# EAGLE board Android Wearable 2-Layer (EAGLE 5.11)
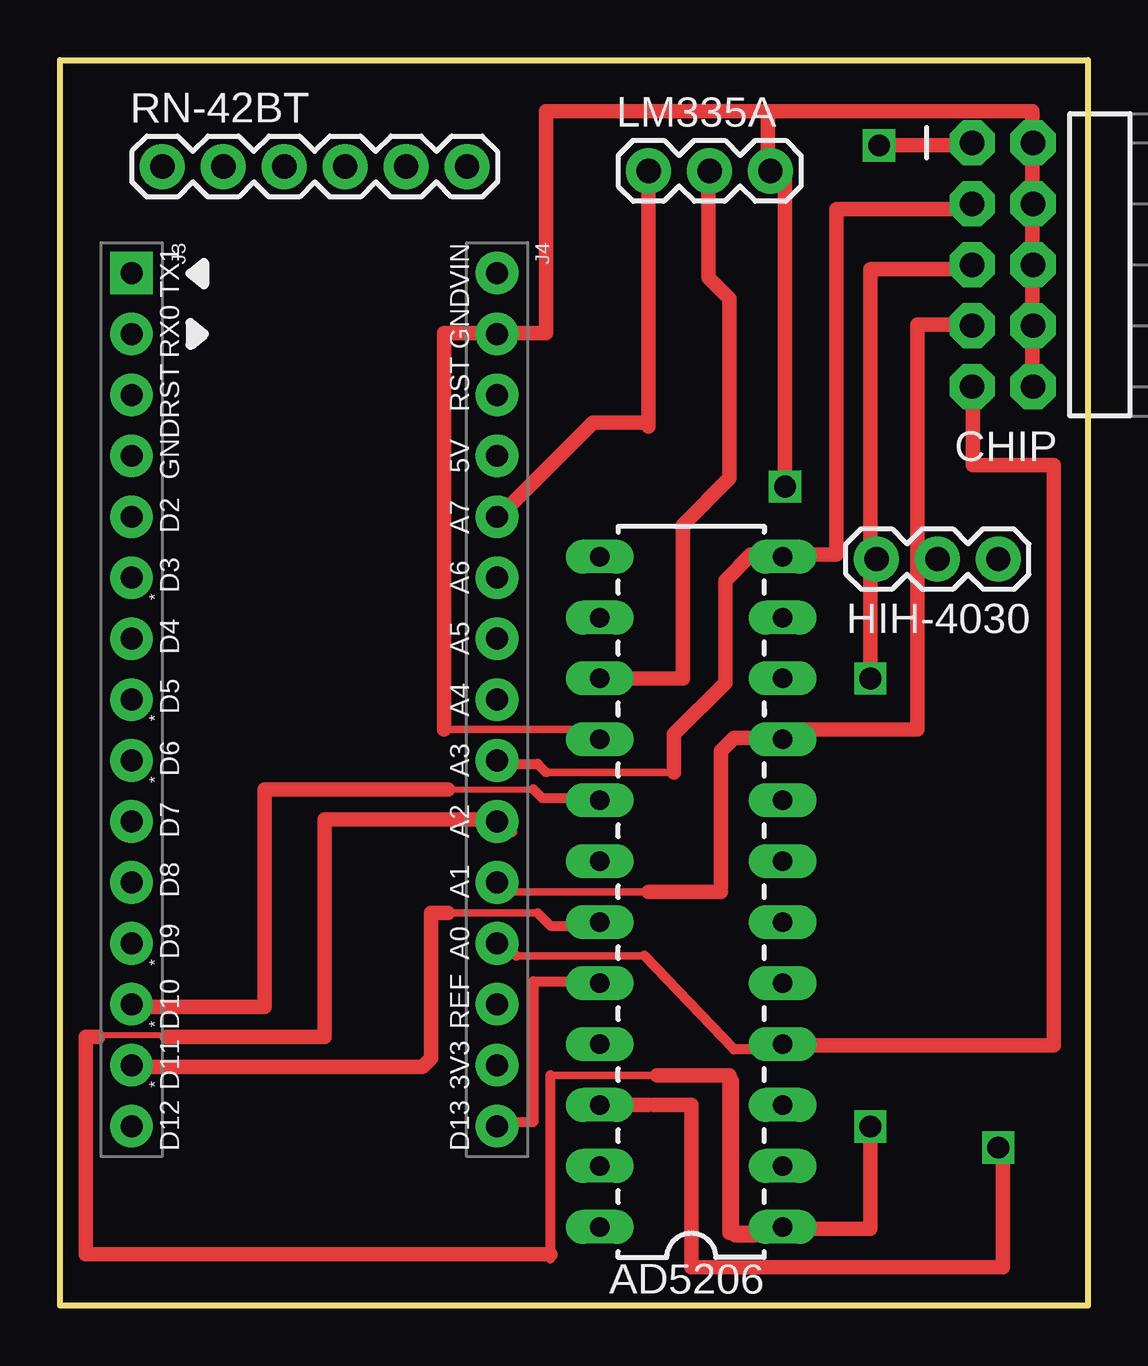
[diagram p0: board, top side]
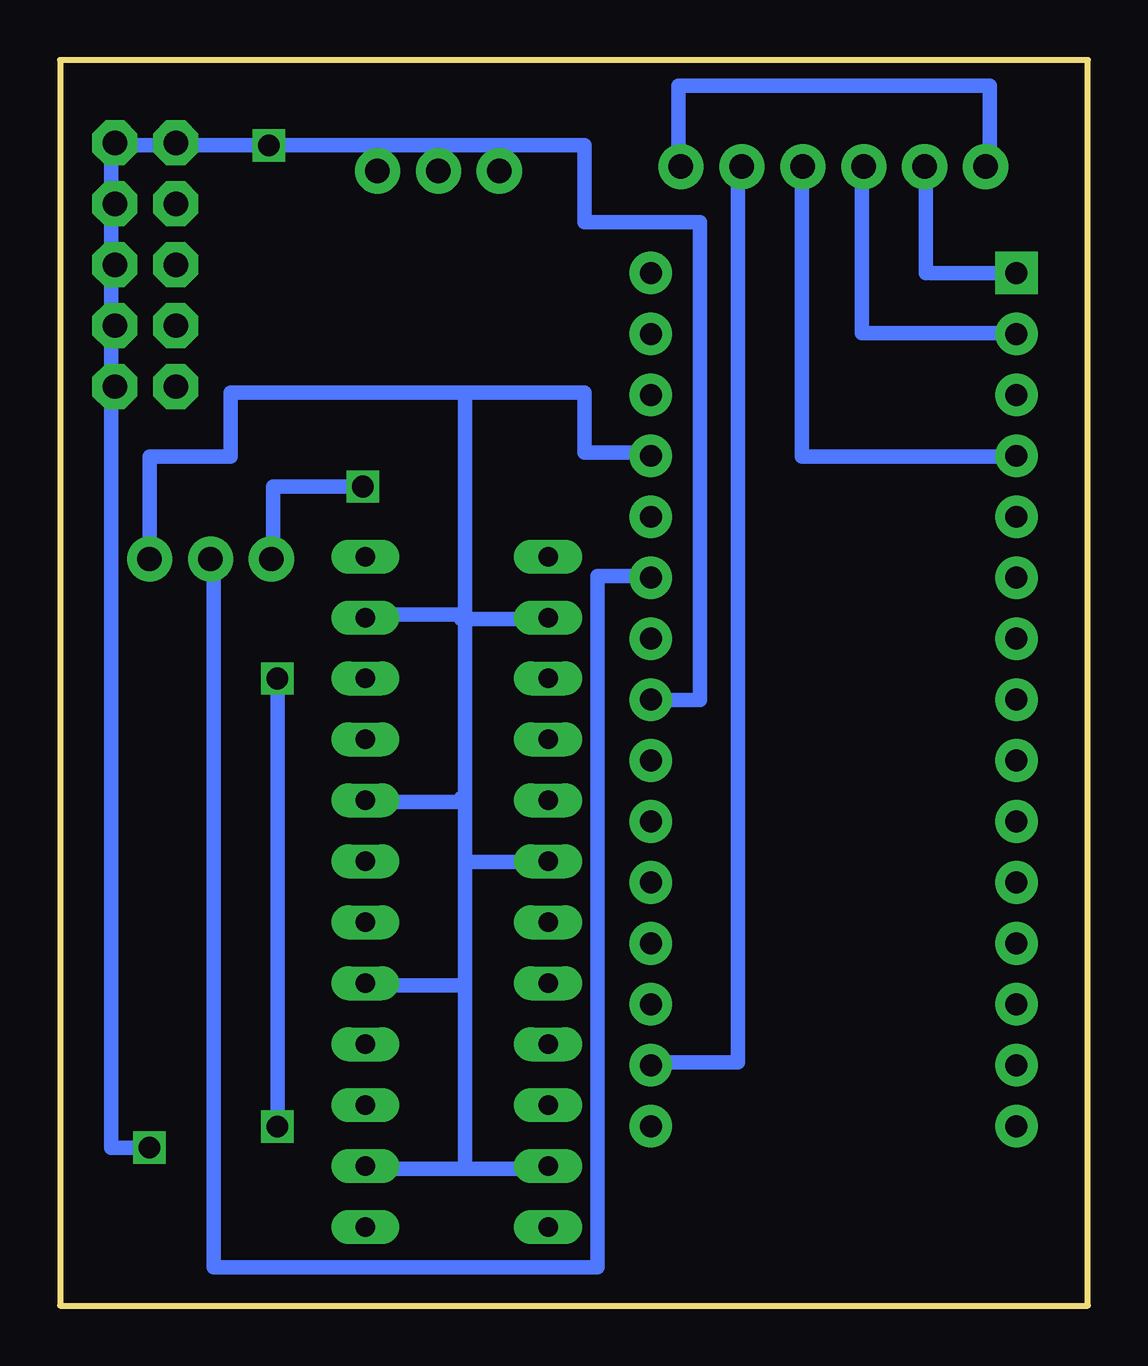
[diagram p1: board, bottom side, seen from below]

Size 42.85 x 51.92 mm. Coordinates in mm from the lower left corner, seen from the top.
Outline: 0,51.92 42.85,51.92 42.85,0 0,0 0,51.92
Copper layers (1*16): Top 0.035mm / dielectric 1.5mm / Bottom 0.035mm
Design rules "default *": minimum track width 8mil, minimum drill 16mil, track to track 8mil, track to pad 8mil, pad to pad 8mil, via to via 8mil, smd to smd 8mil, copper to edge 8mil, drill to drill 8mil, minimum pad ring 12mil, minimum via ring 8mil, stop-mask expansion 4mil, vias tented up to drill 18mil, thermal gap 10mil

## Footprints (pad centres in the part's own frame; a part is rotated, then mirrored left to right if it is on the bottom)
DIL24 = drill 0.813 long: 1 -13.97,-3.81; 2 -11.43,-3.81; 3 -8.89,-3.81; 4 -6.35,-3.81; 5 -3.81,-3.81; 6 -1.27,-3.81; 7 1.27,-3.81; 8 3.81,-3.81; 9 6.35,-3.81; 10 8.89,-3.81; 11 11.43,-3.81; 12 13.97,-3.81; 13 13.97,3.81; 14 11.43,3.81; 15 8.89,3.81; 16 6.35,3.81; 17 3.81,3.81; 18 1.27,3.81; 19 -1.27,3.81; 20 -3.81,3.81; 21 -6.35,3.81; 22 -8.89,3.81; 23 -11.43,3.81; 24 -13.97,3.81
2X5-RA = drill 1.016 pad 1.88 octagon: 1 -1.27,5.08; 2 1.27,5.08; 3 -1.27,2.54; 4 1.27,2.54; 5 -1.27,0; 6 1.27,0; 7 -1.27,-2.54; 8 1.27,-2.54; 9 -1.27,-5.08; 10 1.27,-5.08
1X03 = drill 1.016 pad 1.88 round: 1 0,0; 2 2.54,0; 3 5.08,0
HEAD15-NOSS = drill 0.914 pad 1.778 square: 1 0,0 | drill 0.914 pad 1.778 round: 2 2.54,0; 3 5.08,0; 4 7.62,0; 5 10.16,0; 6 12.7,0; 7 15.24,0; 8 17.78,0; 9 20.32,0; 10 22.86,0; 11 25.4,0; 12 27.94,0; 13 30.48,0; 14 33.02,0; 15 35.56,0
HEAD15-NOSS-1 = drill 0.914 pad 1.778 round: 1 0,0; 2 2.54,0; 3 5.08,0; 4 7.62,0; 5 10.16,0; 6 12.7,0; 7 15.24,0; 8 17.78,0; 9 20.32,0; 10 22.86,0; 11 25.4,0; 12 27.94,0; 13 30.48,0; 14 33.02,0; 15 35.56,0
1X06 = drill 1.016 pad 1.88 round: 1 0,0; 2 2.54,0; 3 5.08,0; 4 7.62,0; 5 10.16,0; 6 12.7,0

## Placement (x,y rotation side)
AD5206  [DIL24]  26.31,17.25 90 top
CHIP  [2X5-RA]  39.29,43.38 0 top
HIH-4030  [1X03]  39.12,31.11 180 top
J3  HEAD15-NOSS  [HEAD15-NOSS]  2.98,43.04 270 top
J4  HEAD15-NOSS-1  [HEAD15-NOSS-1]  18.22,43.04 270 top
LM335A  [1X03]  24.54,47.29 0 top
RN-42BT  [1X06]  4.27,47.47 0 top

## Library data of the parts
AD5206 CHIP HIH-4030 LM335A RN-42BT = SparkFun
J3 J4 = MyCON2

## Nets
S$72: HIH-4030.1

## Tracks (layer width: path | path; a pad name or v marks a point on that pad's centre or on a via)
S$1
  Bottom 0.61: 11.91,47.47 11.91,35.38 3.02,35.38
S$2
  Top 0.254: 4.37,11.25 1.65,11.25
S$3
  Bottom 0.61: 14.58,47.47 14.58,10.13 18.31,10.13
S$4
  Bottom 0.61: 30.05,28.8 26.14,28.8 26.14,28.63
S$5
  Bottom 0.61: 26.14,21.16 26.14,20.98
S$6
  Top 0.61: 24.71,8.36 26.31,8.36 26.31,1.6 39.29,1.6 39.29,6.4
S$7
  Bottom 0.61: 30.23,20.98 26.31,20.98
S$8
  Top 0.61: 30.23,10.85 41.43,10.85 41.43,35.03 38.05,35.03 38.05,38.05
S$9
  Top 0.305: 4.45,11.2 10.85,11.2
  Top 0.406: 18.31,20.27 18.85,19.74
  Top 0.61: 18.31,20.27 11.02,20.27 11.02,11.2 4.45,11.2
S$10
  Bottom 0.61: 2.84,43.03 6.58,43.03
S$11  (via drill 0.9)
  Top 0.305: 20.45,9.6 24.89,9.6
  Top 0.406: 30.23,3.2 30.23,2.84 28.09,2.84 28.09,9.42 27.91,9.6 | 20.45,1.96 20.45,2.13 20.45,9.6
  Top 0.61: v33.78,7.47 33.78,3.2 30.23,3.2 30.05,3.02 27.91,3.02 27.91,9.6 24.89,9.6 | 1.6,11.2 1.07,11.2 1.07,2.13 20.45,2.13
S$12
  Top 0.61: 33.78,26.31 33.78,43.21 38.23,43.21
S$14
  Top 0.305: 24.36,14.58 19.02,14.58
  Top 0.406: 30.05,10.67 28.09,10.67 24.36,14.58 | 19.02,14.58 18.31,15.11
S$15
  Top 0.305: 18.67,17.25 24.89,17.25
  Top 0.406: 18.31,17.6 18.67,17.25
  Top 0.61: 27.56,17.25 24.89,17.25 24.54,17.25
S$18  (via drill 0.9)
  Top 0.305: 22.58,24 16,24
  Top 0.406: 22.58,23.65 22.58,24
  Top 0.61: 40.72,37.87 40.54,37.87 40.54,49.78 29.52,49.78 | 29.52,49.78 20.27,49.78 20.27,40.54 18.31,40.54 18.14,40.54 16,40.54 16,24 | 29.52,49.78 29.52,47.3 30.23,47.3 v30.23,34.14
  Bottom 0.61: 33.96,31.11 33.96,34.14 v30.23,34.14
S$19
  Top 0.61: 29.87,23.65 28.09,23.65 27.56,23.11 27.56,17.42
S$21
  Top 0.305: 20.27,22.22 25.6,22.22
  Top 0.406: 20.27,22.22 19.91,22.58 18.31,22.58
  Top 0.61: 30.23,31.29 28.8,31.29 27.74,30.23 27.74,25.96 25.6,23.82 25.6,22.22
S$23  (via drill 0.9)
  Top 0.61: v34.14,48.36 38.41,48.36
  Bottom 0.61: 18.49,25.25 16.18,25.25 16.18,45.16 20.98,45.16 20.98,48.36 v34.14,48.36 40.72,48.36 40.72,6.58 v39.12,6.58
S$41
  Top 0.305: 16.18,16.36 19.91,16.36
  Top 0.406: 16.18,16.36 16,16.36 | 19.91,16.36 20.45,15.82 22.22,15.82 22.4,16
  Top 0.61: 3.2,9.96 15.11,9.96 15.47,10.31 15.47,16.36 16.18,16.36
S$42
  Top 0.406: 22.58,21.16 20.09,21.16 19.74,21.51
S$45
  Bottom 0.61: 4.09,47.47 4.09,50.85 17.07,50.85 17.07,47.47
S$46
  Top 0.61: 38.23,45.7 32.36,45.7 32.36,31.29 30.4,31.29
S$49
  Top 0.61: 38.05,40.54 38.05,40.89
S$50
  Top 0.61: 22.58,8.18 22.58,8.36
S$52
  Top 0.406: 22.58,13.51 19.74,13.51 19.74,7.65 18.14,7.65 18.14,7.47
S$53
  Top 0.406: 22.4,8.36 22.4,8.18
S$54
  Top 0.61: 30.05,3.02 30.05,3.2
S$55
  Bottom 0.61: 30.05,13.33 26.14,13.33
S$60
  Top 0.61: 38.05,43.21 38.05,43.03
S$65
  Bottom 0.61: 9.42,47.3 9.42,40.54 2.84,40.54
S$66
  Bottom 0.61: 6.76,47.47 6.76,43.92 6.76,43.56 6.76,43.03
S$70
  Bottom 0.406: 18.14,35.38 18.14,35.56
S$73
  Top 0.61: 22.94,8.36 24.54,8.36
S$77
  Top 0.61: 38.05,45.7 38.05,45.87
S$79
  Bottom 0.61: 18.31,35.56 20.98,35.56 20.98,38.05 25.78,38.05 25.96,38.05 | 22.58,28.63 25.96,28.63 | 25.96,28.63 25.96,38.05 | 25.96,18.49 25.96,28.63 | 25.96,18.49 22.76,18.49 | 25.96,5.69 25.96,18.49 | 25.96,5.69 30.23,5.69 | 22.4,5.69 25.96,5.69 | 39.12,31.29 39.12,35.38 35.74,35.38 35.74,37.34 35.74,37.69 35.74,38.05 25.96,38.05
S$80
  Top 0.61: 27.03,47.3 27.03,42.85 27.91,41.96 27.91,34.49 25.96,32.54 25.96,26.14 22.76,26.14 22.58,26.31
S$83
  Top 0.61: 24.54,47.47 24.54,36.8 | 24.54,36.8 24.54,36.63 | 24.54,36.8 22.22,36.8 18.14,32.72
S$86
  Bottom 0.61: 18.31,30.4 20.45,30.4 20.45,1.6 36.45,1.6 36.45,31.11
S$99
  Top 0.254: 16.18,21.51 19.74,21.51
  Top 0.61: 3.02,12.45 8.53,12.45 8.53,21.51 16.18,21.51
S$107  (via drill 0.9)
  Bottom 0.61: 33.78,26.31 v33.78,26.14 33.78,7.65
S$108
  Top 0.61: 38.05,48.18 38.05,48.54
S$109
  Top 0.61: 38.23,40.54 38.23,40.89 35.74,40.89 35.74,24 30.23,24

## Text on the board
tPlace: TX1 | VIN | RX0 | GND | RST | RST | GND | 5V | D2 | A7 | * | D3 | A6 | D4 | A5 | D5 | A4 | * | * | D6 | A3 | D7 | A2 | D8 | A1 | D9 | A0 | * | * | D10 | REF | * | D11 | 3V3 | D12 | D13